# Altium PCB MotoBot.PcbDoc
Units mil, origin at the board's own origin, x right, y up, seen from the top; angles counter-clockwise.
Board outline 6000 x 4000 mil, 2 copper layers (Top Layer, Bottom Layer); 30 components, 16 nets, 113 pads, 0 vias.
Unrouted connection lines stored in the file: 48.
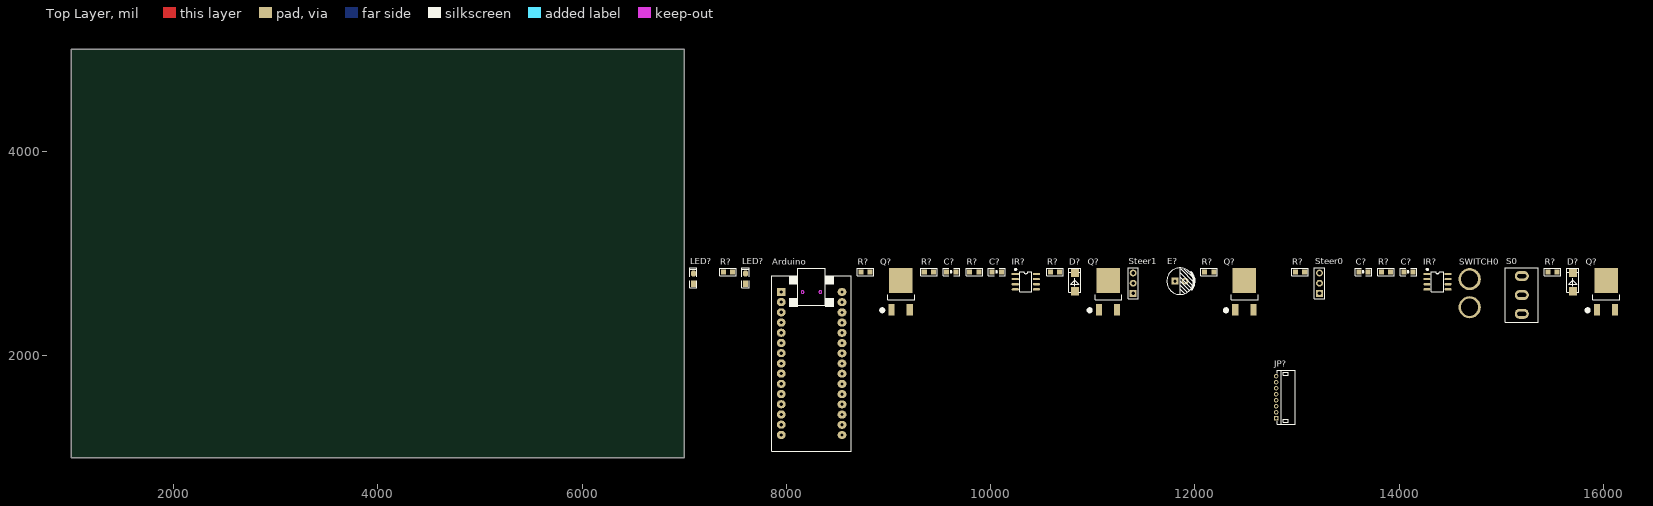
[diagram p0: Top Layer view]
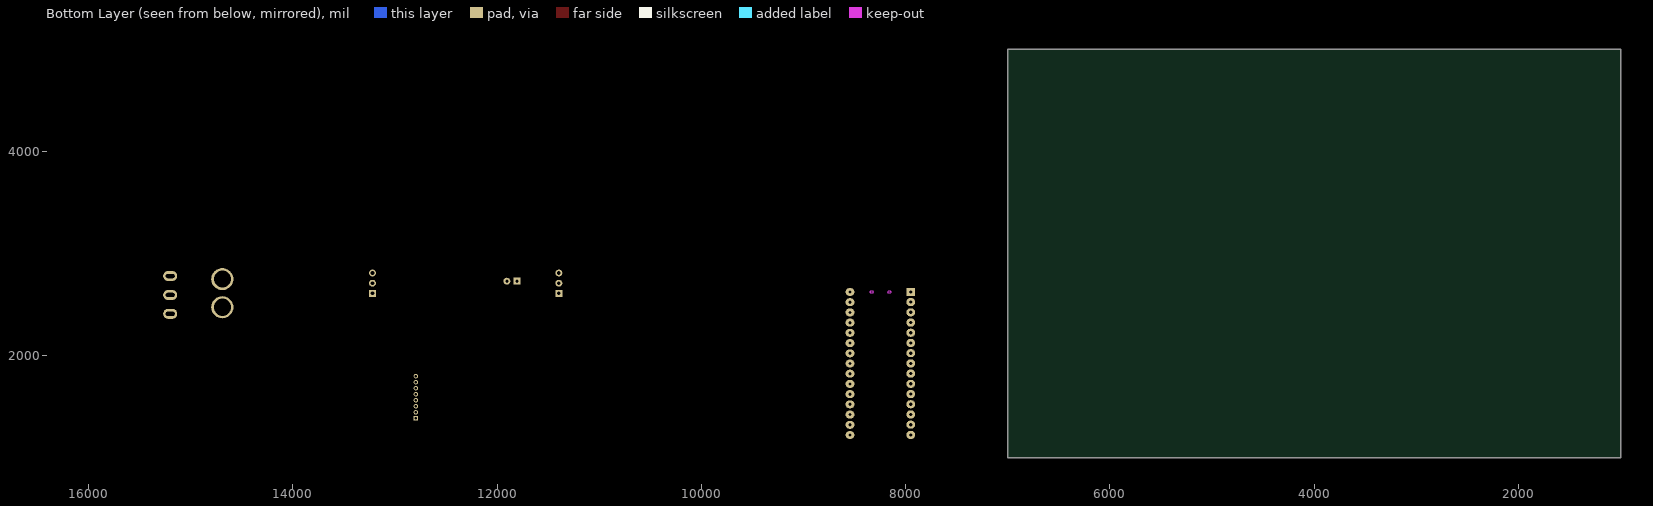
[diagram p1: Bottom Layer view, seen from below]

## Layer stack, top to bottom
Top Solder: solder mask 0.4, Solder Resist, Dk 3.5
Top Layer: signal copper 1.4
Dielectric 1: dielectric 12.6, FR-4, Dk 4.8
Bottom Layer: signal copper 1.4
Bottom Solder: solder mask 0.4, Solder Resist, Dk 3.5

## Board outline
1000,1000 7000,1000 7000,5000 1000,5000

## Design rules (kind name [scope] priority, off if disabled: settings)
Clearance [All] p1: gap=10 ignorepadtopadclearanceinfootprint=FALSE except(0: Arc-Hole Track-Hole SMDPad-Hole THPad-Hole Via-Hole Fill-Hole Poly-Hole Region-Hole Text-Hole)
PolygonConnect [All] p1: connectstyle=Relief reliefconductorwidth=10 reliefentries=4 polygonreliefangle="90 Angle" airgapwidth=10
RoomDefinition MotoBot [InComponentClass('MotoBot')] p1: confinementstyle=ConfineIn formatcopy=TRUE lockcomponents=FALSE outline 7045,1055 16170,1055 16170,2970 7045,2970
RoutingVias [All] p1: holewidth=28 width=50 viastyle="Through Hole" minholewidth=28 minwidth=50 maxholewidth=28 maxwidth=50
SolderMaskExpansion [All] p1: expansion=4
Width [All] p1: maxlimit=10 minlimit=10 preferedwidth=10
30 further rules are at their usual default settings.

## Classes and differential pairs
component class MotoBot: Arduino C? CON? D? E? IR? JP? LED? Q? R? S0 Steer0 Steer1 SWITCH0

## Components (designator, comment, footprint, x,y, rotation, side; value= is the part's Value field where it differs from the comment)
Arduino "NANO" NANO 7950,2625 r0 top
C? "1u" "C 0805_M" 14090,2820 r0 top
C? "0.1u" "C 0805_M" 13650,2820 r0 top
C? "0.1u" "C 0805_M" 9615,2820 r0 top
C? "1u" "C 0805_M" 10060,2820 r0 top
D? "SS14" SMA 10825,2720 r90 top
D? "SS14" SMA 15700,2720 r90 top
E? "220uF/16V" "CAP 2.5*6.3*7" 11855,2730 r0 top
IR? "IR2104" SOP8_N 14375,2725 r0 top
IR? "IR2104" SOP8_N 10345,2725 r0 top
JP? "HDR-1X8" ZH1.5-WI-8P 12795,1593.58 r90 top
LED? "" "LED 0805R" 7090,2755 r90 top
LED? "" "LED 0805R" 7600,2755 r90 top
Q? "IRLR7843" TO252 16025,2570 r0 top
Q? "IRLR7843" TO252 12485,2570 r0 top
Q? "IRLR7843" TO252 11150,2570 r0 top
Q? "IRLR7843" TO252 9120,2570 r0 top
R? "30" "R 0805_M" 9395,2820 r0 top
R? "30" "R 0805_M" 10630,2820 r0 top
R? "10K" "R 0805_M" 8775,2820 r0 top
R? "10K" "R 0805_M" 9840,2820 r0 top
R? "2K" "R 0805_M" 7430,2820 r0 top
R? "30" "R 0805_M" 13030,2820 r0 top
R? "10K" "R 0805_M" 12140,2820 r0 top
R? "10K" "R 0805_M" 13870,2820 r0 top
R? "30" "R 0805_M" 15500,2820 r0 top
S0 "MTS-10x" MTS-10x 15200,2595 r90 top
Steer0 "HDR-1X3" HDR-1X3 13220,2610 r90 top
Steer1 "HDR-1X3" HDR-1X3 11395,2610 r90 top
SWITCH0 "XT60" XT60 14690,2750 r0 top

## Footprints (in the part's own frame and the unit in brackets; to place one, negate y for a bottom-side part, rotate by r counter-clockwise, add the part's x,y. Pads: shape width x height; smd on the part's side, far side on the other; paste and mask are expansions set on the pad)
"C 0805_M" [mil] "无极性贴片电容"
  rect 50x50 smd: 1(-45,0) 2(45,0)
  silkscreen extent -81,-36 81,36, body extent -39,-24 39,24, height 20
"CAP 2.5*6.3*7" [mm] "脚距2.5mm直径6.3mm高度7mm"
  rect 1.7x1.7 hole 0.8: 1(-1.25,0)
  round 1.7 hole 0.8: 2(1.25,0)
  silkscreen extent -3.3,-3.3 3.56,3.3, body extent -3.15,-3.15 3.16,3.15, height 7.03
HDR-1X3 [mm] "排针，3脚"
  rect 1.7x1.7 hole 0.9: 1(0,0)
  round 1.7 hole 0.9: 2(2.54,0) 3(5.08,0)
  silkscreen extent -1.27,-1.27 6.35,1.27, body extent -1.27,-1.27 6.35,1.27, height 8.5
"LED 0805R" [mil] "红色0805LED"
  rect 60x50 smd: 1(-50,0)
  oct 60x50 smd: 2(50,0)
  silkscreen extent -90,-35 105,35, body extent -39,-25 39,25, height 32
MTS-10x [mm] "MTS10系列3脚扭子开关"
  oval 2.5x3.5 hole 1 slot 2.2 at 90 deg unplated: 1(-4.7,0) 2(0,0) 3(4.7,0)
  silkscreen extent -6.73,-4.06 6.73,4.06, body extent -6.6,-3.95 6.6,3.95, height 30.47
NANO [mil]
  oval 86.61x78.74 hole 32: 1(595,-1401) 2(595,-1301) 3(595,-1201) 4(595,-1101) 5(595,-1001) 6(595,-901) 7(595,-801) 8(595,-701) 9(595,-601) 10(595,-501) 11(595,-401) 12(595,-301) 13(595,-201) 14(595,-101) 15(595,-1) 17(0,-100) 18(0,-200) 19(0,-300) 20(0,-400) 21(0,-500) 22(0,-600) 23(0,-700) 24(0,-800) 25(0,-900) 26(0,-1000) 27(0,-1100) 28(0,-1200) 29(0,-1300) 30(0,-1400)
  rect 86.61x78.74 hole 32: 16(0,0)
  Keep-Out Layer circle w1.97: c209.39,-1.95 r13.78
  Keep-Out Layer circle w1.97: c382.62,-1.95 r13.78
  silkscreen extent -93,-1558 685,230
"R 0805_M" [mil] "1/8W贴片电阻"
  rect 50x50 smd: 1(-45,0) 2(45,0)
  silkscreen extent -81,-36 81,36, body extent -39,-25 39,25, height 20
SMA [mm]
  rect 2x2 smd: 1(-2.25,0) 2(2.25,0)
  silkscreen extent -2.5,-1.5 3.5,1.5, body extent -2.5,-1.35 2.5,1.35, height 2.15
SOP8_N [mm] "5*6*1.8mm（长宽高）"
  rect 1.8x0.55 smd: 1(-2.625,1.905)
  oval 1.8x0.55 smd: 2(-2.625,0.635) 3(-2.625,-0.635) 4(-2.625,-1.905) 5(2.625,-1.905) 6(2.625,-0.635) 7(2.625,0.635) 8(2.625,1.905)
  silkscreen extent -2.69,-2.5 1.52,3.2, body extent -3,-2.5 3,2.5, height 1.9
TO252 [mil] "252晶体管"
  rect 60x115 smd: 1(-89.55,-119.77)
  rect 230x245 smd: 2(0,165.35)
  rect 60x110 smd: 3(88.45,-120.77)
  silkscreen extent -196,-140 135,28, body extent -127,-120 129,251, height 91
XT60 [mm]
  round 5.5 hole 4.25: 0(0,0) 1(0,-7)
ZH1.5-WI-8P [mm] "长：13.5，宽：4.5，高：3.6"
  rect 1.1x1.1 hole 0.65: 1(-5.25,0)
  round 1.1 hole 0.65: 2(-3.75,0) 3(-2.25,0) 4(-0.75,0) 5(0.75,0) 6(2.25,0) 7(3.75,0) 8(5.25,0)
  silkscreen extent -6.75,-4.75 6.75,-0.25, body extent -6.75,-4.75 6.75,0.25, height 3.65

## Part data
C? C? C? C?: library part C, "无极性贴片电容"
D? D?: "肖特基二极管", BOM名称=肖特基二极管, 学习资源=www.ooocke.com, 属性=40V/1A, 版权归属=源创客
E?: library part C-CAP, "直插电解电容"
IR? IR?: "电机驱动芯片", BOM名称=外置EEPROM, 学习资源=www.ooocke.com, 版权归属=源创客
JP?: library part "Header 8", "8P接插件", BOM名称=8P接插件, 学习资源=www.ooocke.com, 版权归属=源创客
LED? LED?: library part LED-SMD, "贴片LED", BOM名称=贴片LED, 学习资源=www.ooocke.com, 版权归属=源创客
Q? Q? Q? Q?: "N沟场效应管"
R? R? R? R? R? R? R? R? R?: library part R, "贴片电阻"
S0: "MTS10x系列3脚扭子开关"
Steer0 Steer1: library part "Header 3", "3P接插件", BOM名称=3P接插件, 学习资源=https://lmdzstyle.taobao.com/, 版权归属=黎明电子style

## Nets (pads, with @x,y where several pads share a name; then routed paths per layer and width w, separated by ;. In a path a pad name is that pad's centre, name@x,y a point inside that pad or via, vN(x,y) a via of type N, cw(c..) or ccw(c..) an arc to the next point about the centre after c; other vN are vias at no path point)
12V: C?.2@9660,2820 C?.2@13695,2820 D?.1 E?.1 IR?.1 IR?.3 S0.1
+5: Steer0.2 Steer1.2
EGND: C?.1@9570,2820 C?.1@13605,2820 IR?.4 Q?.3@9208.45,2449.23 Q?.3@12573.45,2449.23 R?.1@8730,2820 R?.1@12095,2820
EVCC: Q?.2@11150,2735.35 Q?.2@16025,2735.35
GND: Arduino.4 Arduino.29 E?.2 JP?.8 Steer0.3 Steer1.3 SWITCH0.1
MOTOR1: C?.1@14045,2820 IR?.6@14478.35,2700 LED?.1@7090,2705 LED?.2@7600,2805 Q?.2@12485,2735.35 Q?.3@16113.45,2449.23 R?.1@13825,2820
MOTOR2: C?.1@10015,2820 IR?.6@10448.35,2700 Q?.2@9120,2735.35 Q?.3@11238.45,2449.23 R?.1@7385,2820 R?.1@9795,2820
NetC?_2: C?.2@14135,2820 D?.2@15700,2808.58 IR?.8@14478.35,2800
NetIR?_5: IR?.5@14478.35,2650 R?.1@12985,2820 R?.2@12185,2820
NetIR?_7: IR?.7@14478.35,2750 R?.1@15455,2820 R?.2@13915,2820
NetLED?_1: LED?.1@7600,2705 LED?.2@7090,2805 R?.2@7475,2820
NetQ?_1: Q?.1@12395.45,2450.23 R?.2@13075,2820
NetS0_2: S0.2 SWITCH0.0
PWM0: Arduino.8 Steer0.1
PWM1: Arduino.9 IR?.2@14271.65,2750 Steer1.1
PWM2: IR?.2@10241.65,2750
pads on no net: Arduino.1 Arduino.2 Arduino.3 Arduino.5 Arduino.6 Arduino.7 Arduino.10 Arduino.11 Arduino.12 Arduino.13 Arduino.14 Arduino.15 Arduino.16 Arduino.17 Arduino.18 Arduino.19 Arduino.20 Arduino.21 Arduino.22 Arduino.23 Arduino.24 Arduino.25 Arduino.26 Arduino.27 Arduino.28 Arduino.30 C?.2@10105,2820 D?.2@10825,2808.58 IR?.5@10448.35,2650 IR?.7@10448.35,2750 IR?.8@10448.35,2800 JP?.1 JP?.2 JP?.3 JP?.4 JP?.5 JP?.6 JP?.7 Q?.1@9030.45,2450.23 Q?.1@11060.45,2450.23 Q?.1@15935.45,2450.23 R?.1@9350,2820 R?.1@10585,2820 R?.2@8820,2820 R?.2@9440,2820 R?.2@9885,2820 R?.2@10675,2820 R?.2@15545,2820 S0.3